# Altium PCB MLA_v1-02Dec2014.PcbDoc
Units mil, origin at the board's own origin, x right, y up, seen from the top; angles counter-clockwise.
Board outline 1377.95 x 629.92 mil, 2 copper layers (Top Layer, Bottom Layer); 4 components, 3 nets, 14 pads, 0 vias.
Unrouted connection lines stored in the file: 1.
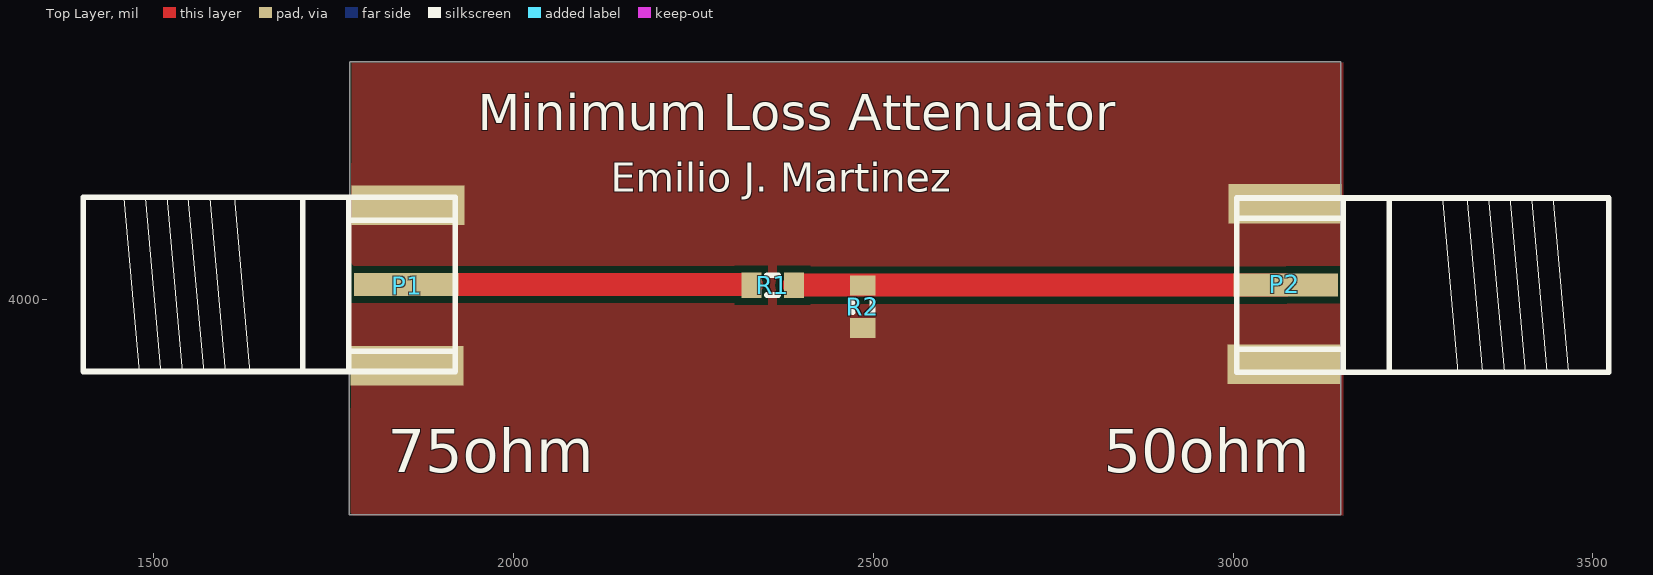
[diagram p0: Top Layer view]
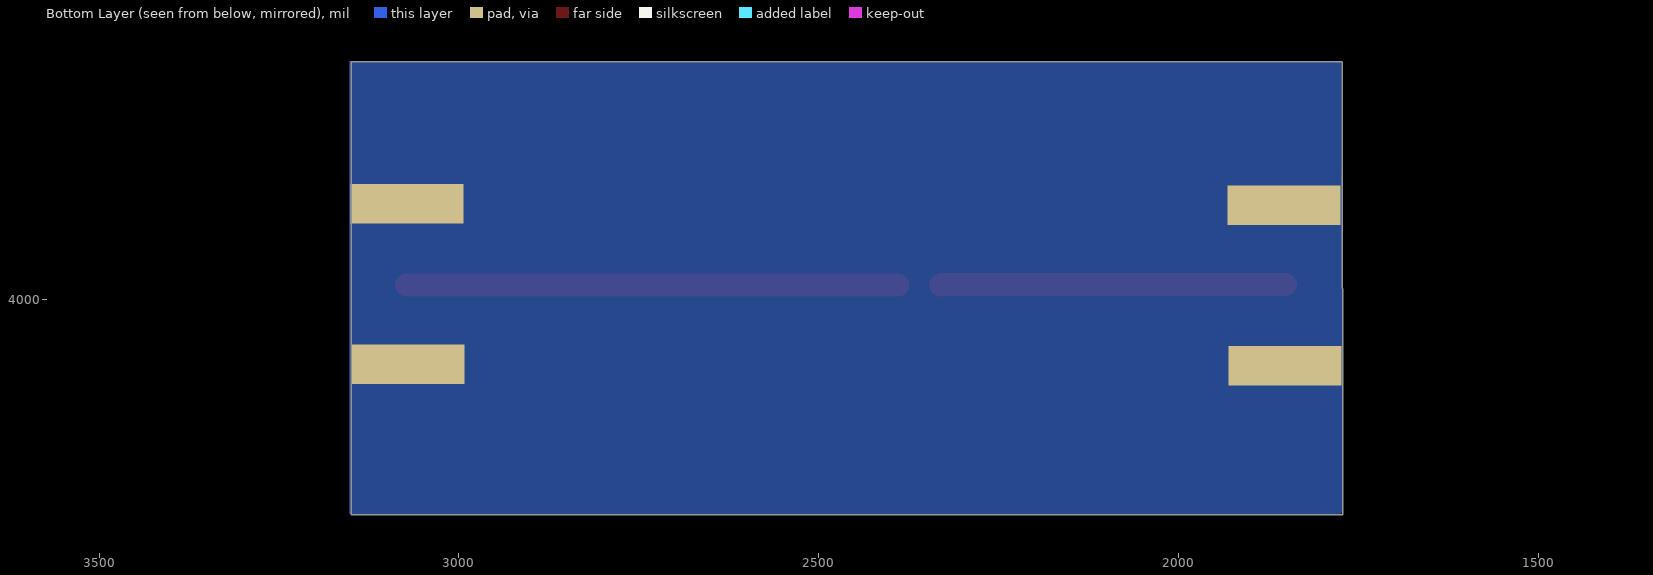
[diagram p1: Bottom Layer view, seen from below]

## Layer stack, top to bottom
Top Layer: signal copper 1.4
Dielectric: dielectric 12.6, FR-4, Dk 4.8
Bottom Layer: signal copper 1.4

## Board outline
1772,4329.59 1773.12,4330.71 3149.61,4330.71 3149.61,3700.79 1771.65,3700.79

## Design rules (kind name [scope] priority, off if disabled: settings)
Clearance [All] p1: gap=10
PlaneConnect [All] p1: planeconnectstyle=Direct reliefexpansion=20 reliefentries=4 reliefconductorwidth=10 reliefairgap=10
PolygonConnect [All] p1: connectstyle=Direct reliefconductorwidth=10 reliefentries=4 polygonreliefangle="90 Angle" airgapwidth=10
RoutingVias [All] p1: holewidth=28 width=50 viastyle="Through Hole" minholewidth=28 minwidth=50 maxholewidth=28 maxwidth=50
SolderMaskExpansion [All] p1: expansion=4
Width [All] p1: maxlimit=50 minlimit=30 preferedwidth=50 minimp=50.000000 maximp=50.000000 favimp=50.000000
27 further rules are at their usual default settings.

## Components (designator, comment, footprint, x,y, rotation, side; value= is the part's Value field where it differs from the comment)
P1 "SMA" SMA 1398,3896 r0 top
P2 "SMA" SMA 3526,4145 r180 top
R1 "" J1-0603 2360,4020 r0 top
R2 "" J1-0603 2485,3990 r90 top

## Footprints (in the part's own frame and the unit in brackets; to place one, negate y for a bottom-side part, rotate by r counter-clockwise, add the part's x,y. Pads: shape width x height; smd on the part's side, far side on the other; paste and mask are expansions set on the pad)
J1-0603 [mm] "Chip Resistor, Body 1.6x0.8mm, IPC High Density"
  rect 0.7x0.9 smd: 1(-0.75,0) 2(0.75,0)
  silkscreen extent -0.2,-0.35 0.2,0.35, body extent -0.85,-0.48 0.85,0.48, height 0.9
SMA [mil] "Connector; SMA"
  rect 145x31.89 smd: 1(453,125)
  rect 157x55 smd: 2(454,12) 2(455,235)
  rect 157x55 smd far side: 2(454,12) 2(455,235)
  silkscreen extent 4,1 521,248, body extent 0,0 525,250, height 140

## Part data
R1 R2: library part Res3, "Resistor"

## Nets (pads, with @x,y where several pads share a name; then routed paths per layer and width w, separated by ;. In a path a pad name is that pad's centre, name@x,y a point inside that pad or via, vN(x,y) a via of type N, cw(c..) or ccw(c..) an arc to the next point about the centre after c; other vN are vias at no path point)
NetP1_1: P1.1 R1.1 | length 479.9
  Top Layer w32: P1.1 2329.47,4021 R1.1
P2_IN: P2.1 R1.2 R2.2 | length 683.5
  Top Layer w32: R1.2 P2.1
P_OUT: P1.2 P2.2 R2.1

## Polygon pours and split planes (outlines as drawn)
P_OUT on Top Layer "P_OUT" (solid, remove dead copper): 1774.83,4329.92 1775.53,4329.12 3153.03,4329.12 3153.03,3700 1773.43,3700
P_OUT on Bottom Layer "P_OUT" (solid, remove dead copper, pour order 3): 1773.86,4331.92 1774.56,4331.12 3152.07,4331.12 3152.07,3702 1772.46,3702

## Silkscreen, mask and mechanical layers (free items; w line width, h text height)
Top Overlay:
  text "Minimum Loss Attenuator" at 1950,4235 h50
  text "Emilio J. Martinez" at 2135,4150 h40
  text "75ohm" at 1825,3760 h60
  text "50ohm" at 2820,3760 h60
Top text:
  text "Minimum Loss Attenuator" at 1950,4235 h50
  text "Emilio J. Martinez" at 2135,4150 h40
  text "75ohm" at 1825,3760 h60
  text "50ohm" at 2820,3760 h60